# Altium PCB Power Distribution 1A out.PcbDoc
Units mil, origin at the board's own origin, x right, y up, seen from the top; angles counter-clockwise.
Board outline 5000 x 1750 mil, 4 copper layers (L1, L2 (GNDs), L3 (+Vsups), L4), stack 23.712 mil thick; 35 components, 20 nets, 100 pads, 19 vias.
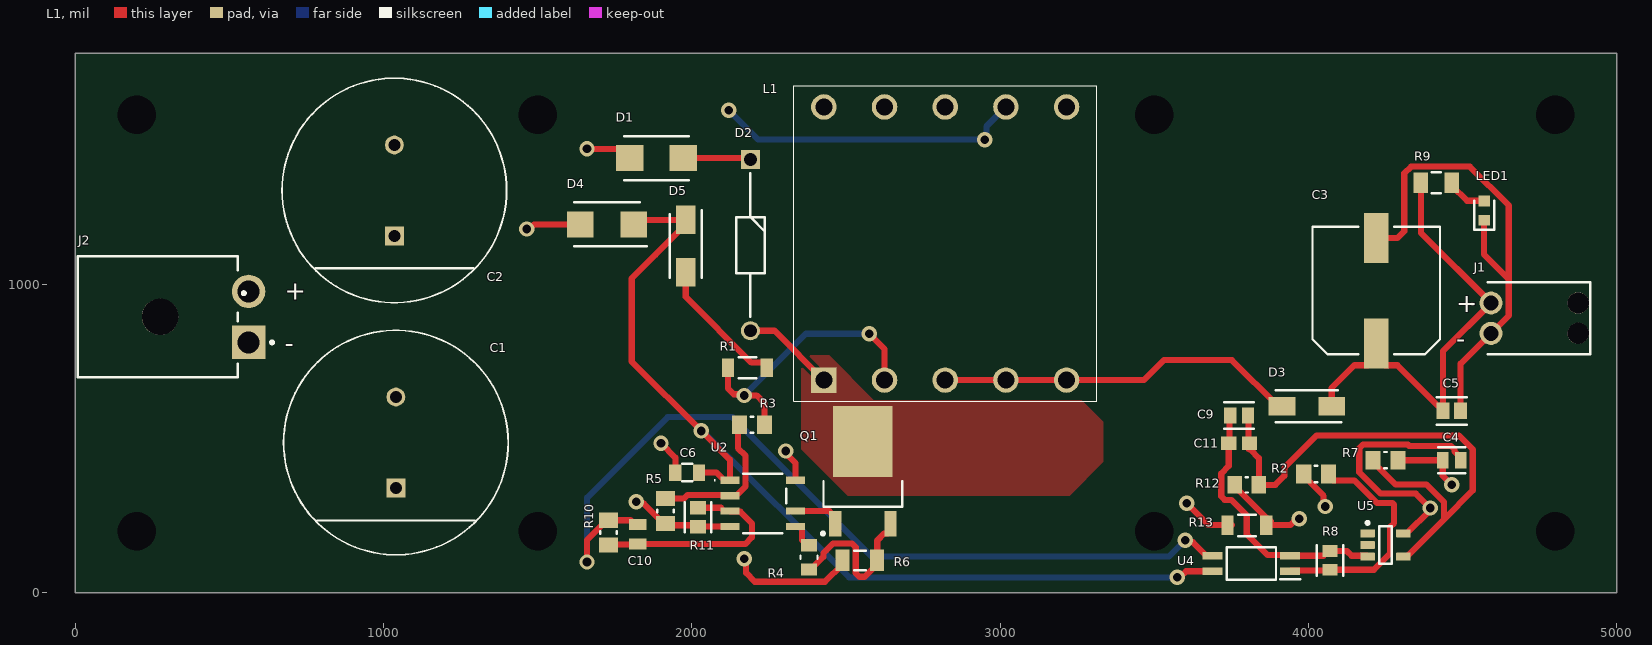
[diagram p0: L1 view]
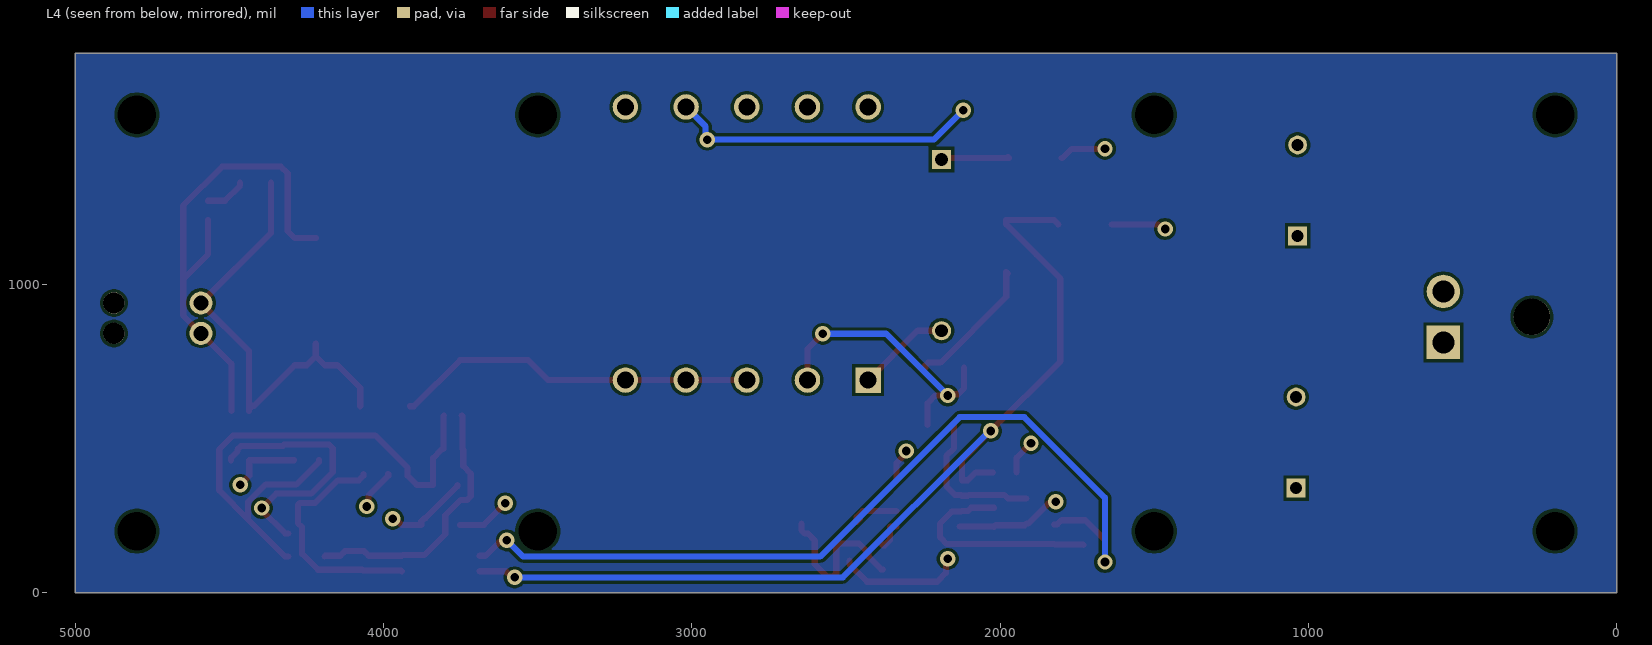
[diagram p1: L4 view, seen from below]
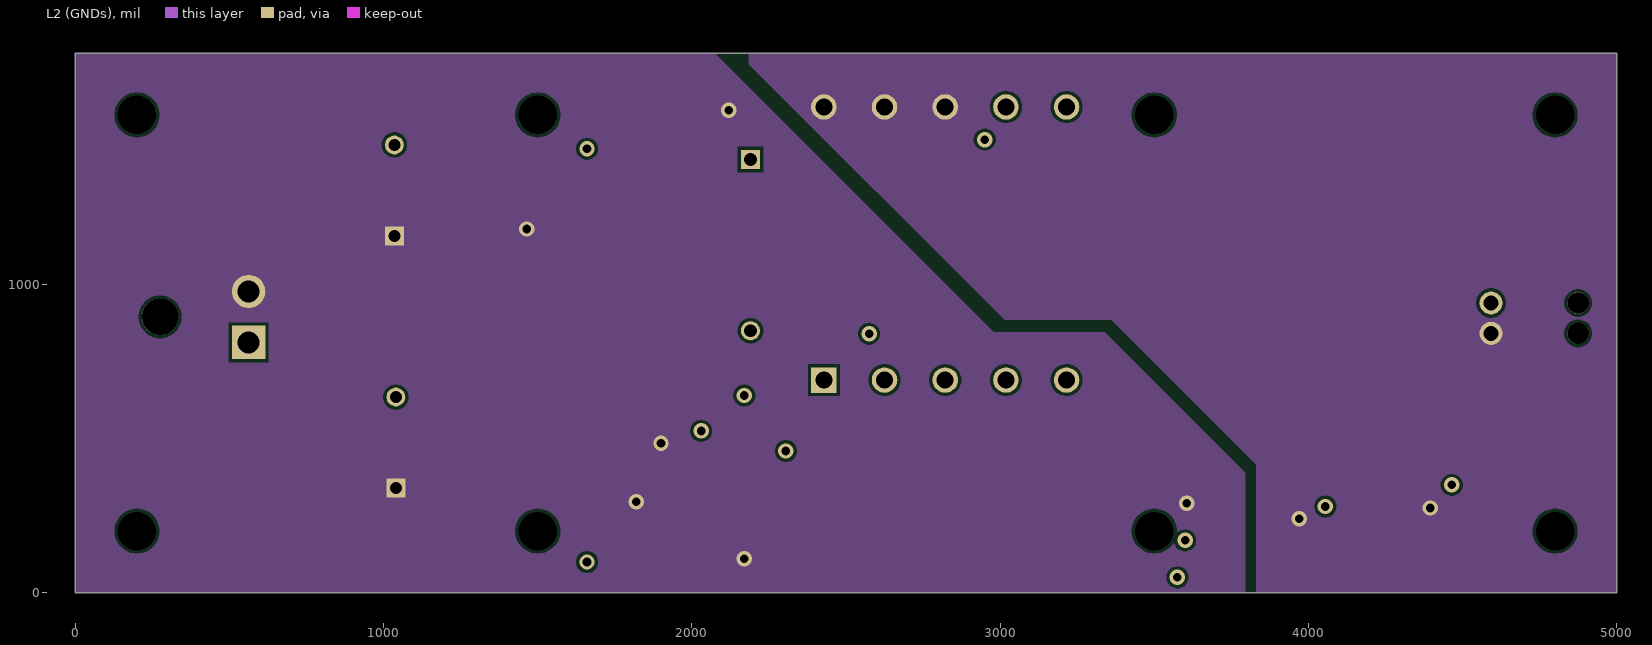
[diagram p2: L2 (GNDs)]
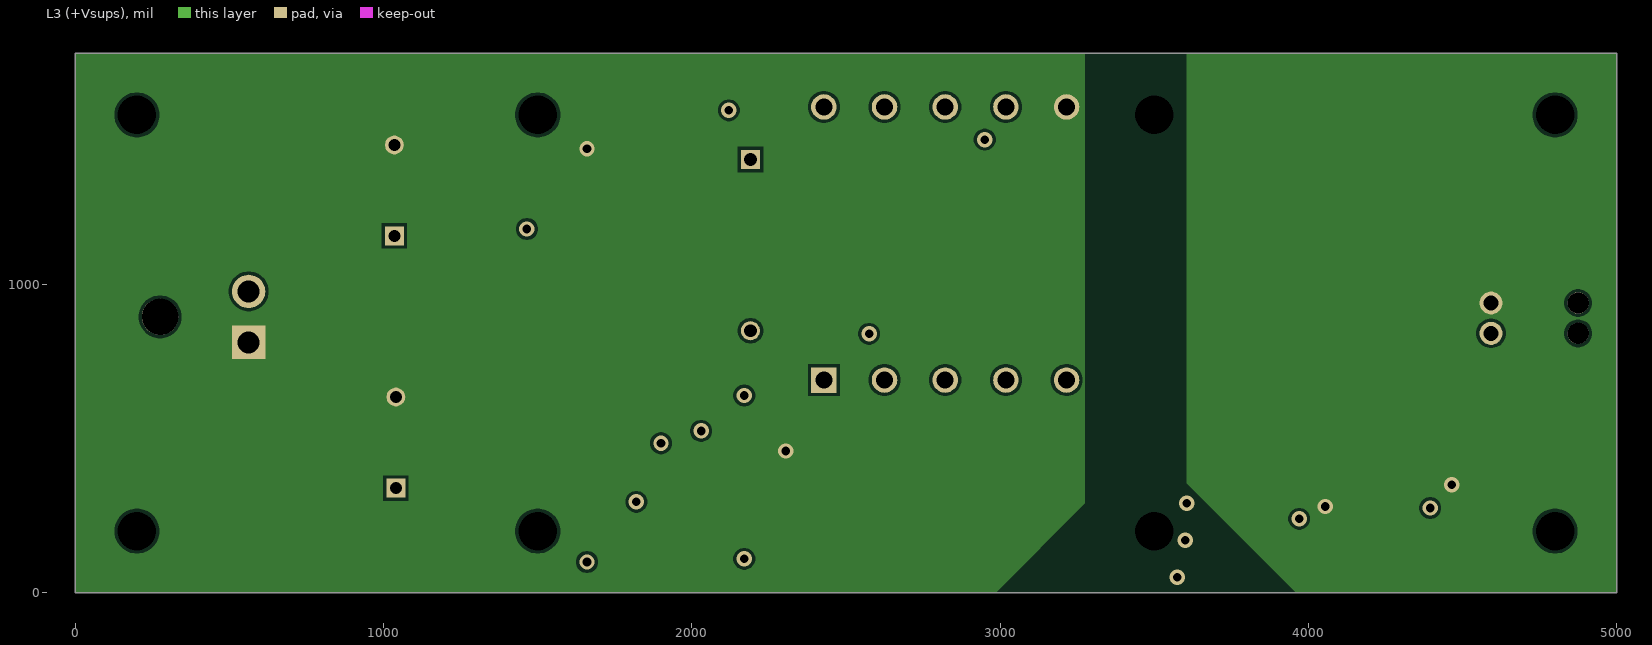
[diagram p3: L3 (+Vsups)]
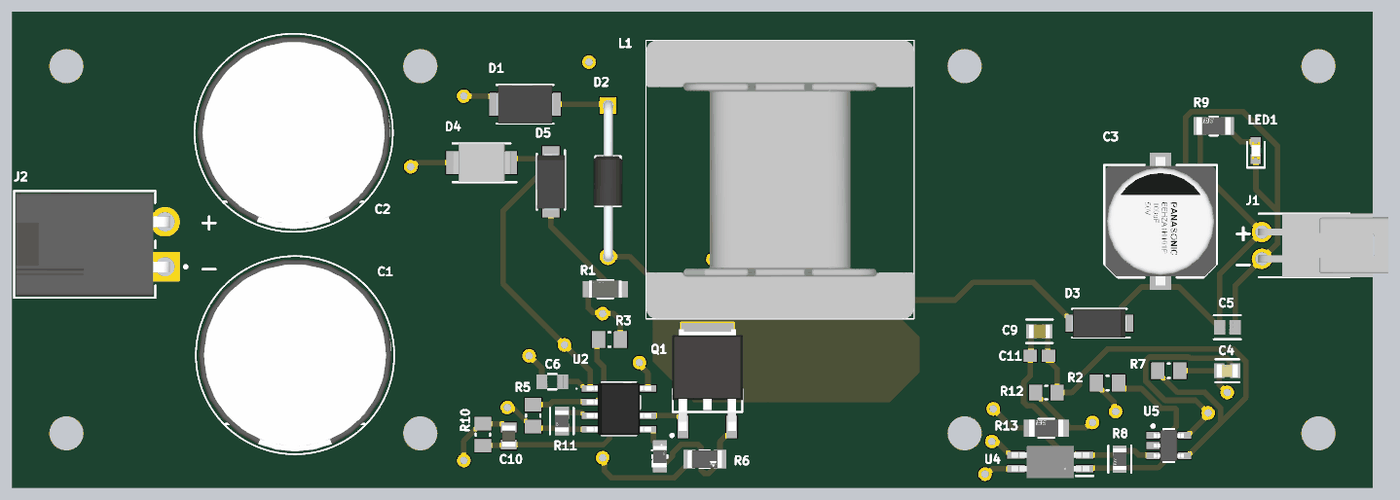
[diagram p4: 3D render of the assembled board from above, using the file's embedded part models]

## Layer stack, top to bottom
Top Solder: solder mask 0.709, Solder Resist, Dk 3.5
L1: signal copper 1.378
Dielectric 2: prepreg 2.8, PP-006, Dk 4.1
L2 (GNDs): signal copper 1.378
Dielectric 1: dielectric 12.6, FR-4, Dk 4.8
L3 (+Vsups): signal copper 1.378
Dielectric 3: prepreg 2.8, PP-006, Dk 4.1
L4: signal copper 1.378
Bottom Solder: solder mask 0.709, Solder Resist, Dk 3.5

## Board outline
0,0 5000,0 5000,1750 0,1750

## Design rules (kind name [scope] priority, off if disabled: settings)
Clearance [All] p1: gap=10 ignorepadtopadclearanceinfootprint=FALSE except(0: Arc-Hole Track-Hole SMDPad-Hole THPad-Hole Via-Hole Fill-Hole Poly-Hole Region-Hole Text-Hole)
PolygonConnect [All] p1: connectstyle=Direct reliefconductorwidth=10 reliefentries=4 polygonreliefangle="90 Angle" airgapwidth=10
RoutingLayers RoutingLayers_2 [All] p1: top layer_v5=TRUE mid layer 1_v5=FALSE mid layer 2_v5=FALSE bottom layer_v5=TRUE
RoutingLayers RoutingLayers_1 [All] p2: top layer_v5=TRUE mid layer 1_v5=TRUE mid layer 2_v5=FALSE bottom layer_v5=FALSE
RoutingLayers [All] p3: top layer_v5=TRUE mid layer 1_v5=FALSE mid layer 2_v5=TRUE bottom layer_v5=FALSE
RoutingVias [All] p1: holewidth=28 width=50 viastyle="Through Hole" minholewidth=28 minwidth=50 maxholewidth=28 maxwidth=50
SolderMaskExpansion [All] p1: expansion=4 istentingtop=FALSE
Width [All] p1: maxlimit=50 minlimit=10 preferedwidth=20 minimp=50.000000 maximp=50.000000 favimp=50.000000
29 further rules are at their usual default settings.

## Components (designator, comment, footprint, x,y, rotation, side; value= is the part's Value field where it differs from the comment)
C1 "47uF" FP-RAD-TH-D_18_0_5-L_20_2-MFG 1040,487.36 r90 top
C2 "47uF" FP-RAD-TH-D_18_0_5-L_20_2-MFG 1035,1305 r90 top
C3 "100uF" FP-ZAG-MFG 4220,980 r270 top
C4 "0.1uF" FP-C0805C-DN-MFG 4465,430 r0 top value="0.10 μF"
C5 "1uF" FP-CL21-IPC_C 4465,590 r0 top
C6 "4.7uF" FP-CGA4J-IPC_C 1985,390 r180 top
C9 "14pF" FP-GQM219-0_15-IPC_C 3775,575 r0 top
C10 "100nF" CAPC2013X94N 1825,190 r90 top
C11 "300pF" CAPC1608X90X35ML15T15 3775,485 r0 top
D1 "SMBJ120A-13-F" DIONM5336X250N 1885,1410 r180 top
D2 "UF4007TA" DIOAD1408W86L464D236 2190,1405.12 r270 top
D3 "BYS10-35-E3_TR" DIOM5127X229N 3995,605 r180 top
D4 "SMBJ22A-Q" DIOM5436X244N 1725,1195 r180 top
D5 "SK220ATR" DIOM5226X295N 1980,1125 r270 top
J1 "105313-1202" 105313-1202 4580.91,890.79 r90 top
J2 "172648-0102" FP-172648-0102-MFG 267.13,895 r270 top
L1 "209:18:12 Custom Flyback Transformer" "49:5 Custom Flyback Transformer-Footprint-1" 2428.15,690 r0 top
LED1 "LTST-C191KGKT" LEDC1608X55N 4570,1240 r90 top
Q1 "STD3NK80ZT4" TO228P972X240-3N 2555,395 r90 top
R1 "22" FP-AC1206-MFG 2180,730 r180 top value=22Ω
R2 "RK73H2ATTD1502F" RESC2013X60X30ML20T20 4025,385 r180 top
R3 "75k" RESC2013X60X30ML20T20 2195,545 r0 top
R4 "1k" FP-RNCP0805-MFG 2380,115 r270 top
R5 "18.2k" RESC2013X60X30ML20T20 1915,265 r90 top
R6 "1.78" FP-CRCW1206-e3-IPC_B 2545,105 r0 top
R7 "442k" RESC2013X60X30ML20T20 4250,430 r0 top
R8 "1k" FP-RMCF0805-IPC_C 4070,105 r270 top
R9 "2k" FP-RMCF1206-IPC_C 4415,1330 r180 top
R10 "210k" RESC2013X50X30ML20T20 1730,195 r90 top
R11 "20k" FP-RNCP0805-IPC_C 2020,245 r90 top
R12 "43.2k" RESC2013X60X35ML10T20 3800,350 r0 top
R13 "0 Ohm Jumper" FP-RMCF1206-MFG 3800.02,218.51 r180 top
U2 "UCC28740QDRQ1" UCC28740QDRQ1 2230,290 r0 top
U4 "PS2811-1-F3-K-A" SOIC127P700X210-4N 3815,95 r180 top
U5 "TL431IDBVR" DBV0005A_M 4250,155 r0 top

## Footprints (in the part's own frame and the unit in brackets; to place one, negate y for a bottom-side part, rotate by r counter-clockwise, add the part's x,y. Pads: shape width x height; smd on the part's side, far side on the other; paste and mask are expansions set on the pad)
"49:5 Custom Flyback Transformer-Footprint-1" [mm]
  rect 2.1x2.1 hole 1.4: 1(0,0)
  round 2.1 hole 1.4: 2(5,0) 3(10,0) 4(15,0) 5(20,0) 6(20,22.5) 7(15,22.5) 8(10,22.5) 9(5,22.5) 10(0,22.5)
  silkscreen extent -2.5,-1.75 22.5,24.25, body extent -2.5,-1.75 22.5,24.25, height 13.04
105313-1202 [mm]
  round 1.9 hole 1.25: 1(1.25,-0.29) 2(-1.25,-0.29)
  round 1.75 hole 1.75 unplated: 3(1.25,-7.47) 4(-1.25,-7.47)
  silkscreen extent -2.97,-8.46 2.97,1.29, body extent -2.97,-12.09 2.97,0.07, height 6.5
CAPC1608X90X35ML15T15 [mm] "Chip Capacitor, 2-Leads, Body 1.60x0.81mm, IPC Low Density"
  rect 1.25x1.1 smd: 1(-0.85,0) 2(0.85,0)
  body extent -0.88,-0.48 0.87,0.48, height 0.9
CAPC2013X94N [mil]
  rect 36x57 smd: 1(-32,0) 2(32,0)
  body extent -40,-25 40,25, height 37
DBV0005A_M [mm] "SOT23, 5-Leads, Body 3.05x1.75mm, Pitch 0.95mm, IPC Low Density"
  rrect15% 1.2x0.65 smd: 1(-1.475,0.95) 2(-1.475,0) 3(-1.475,-0.95) 4(1.475,-0.95) 5(1.475,0.95)
  silkscreen extent -1.6,-1.55 0.5,1.95, body extent -1.42,-1.46 1.42,1.46, height 1.08
DIOAD1408W86L464D236 [mm]
  rect 1.575x1.575 hole 1.05: 1(0,0)
  round 1.575 hole 1.05: 2(14.1,0)
  silkscreen extent 1.14,-1.18 12.96,1.18, body extent -0.43,-1.35 14.51,1.35, height 2.72
DIOM5127X229N [mm]
  rect 2.2x1.55 smd: 1(-2.05,0) 2(2.05,0)
  silkscreen extent -2.83,-1.33 2.55,1.33, body extent -2.55,-1.33 2.55,1.33, height 2.29
DIOM5226X295N [mm]
  rect 2.35x1.6 smd: 1(-2.15,0) 2(2.15,0)
  silkscreen extent -2.95,-1.31 2.62,1.31, body extent -2.62,-1.31 2.62,1.31, height 2.95
DIOM5436X244N [mm]
  rect 2.2x2.15 smd: 1(-2.2,0) 2(2.2,0)
  silkscreen extent -3.27,-1.81 2.7,1.81, body extent -2.7,-1.81 2.7,1.81, height 2.31
DIONM5336X250N [mm]
  rect 2.25x2.15 smd: 1(-2.2,0) 2(2.2,0)
  silkscreen extent -2.65,-1.81 2.65,1.81, body extent -2.65,-1.81 2.65,1.81, height 2.5
FP-172648-0102-MFG [mm]
  rect 2.75x2.75 hole 1.8 paste-1000 mask+0: 1(2.1,7.5)
  round 2.75 hole 1.8 paste-1000 mask+0: 2(-2.1,7.5)
  round 3 hole 3 unplated paste-1000 mask+0: ""(0,0.2)
  silkscreen extent -4.99,-6.59 4.99,9.55, body extent -5.09,-6.69 5.09,8.98, height 0.25
FP-AC1206-MFG [mm]
  rect 1x1.5 smd paste+0 mask+0: 1(-1.6,0) 2(1.6,0)
  silkscreen extent -0.72,-0.85 0.72,0.85, body extent -2.2,-0.95 2.2,0.95, height 0.25
FP-C0805C-DN-MFG [mm]
  rect 0.95x1.35 smd paste+0 mask+0: 1(-0.75,0) 2(0.75,0)
  silkscreen extent -1.1,-1.07 1.1,1.07, body extent -1.4,-0.85 1.4,0.85, height 0.25
FP-CGA4J-IPC_C [mil]
  rect 40x53.39 smd paste+0 mask+0: 1(-38.39,0) 2(38.39,0)
  silkscreen extent -16,-29 16,29, body extent -53,-32 53,32, height 10
FP-CL21-IPC_C [mil]
  rect 41.52x53.39 smd paste+0 mask+0: 1(-28.57,0) 2(28.57,0)
  silkscreen extent -49,-44 49,44, body extent -53,-32 53,32, height 10
FP-CRCW1206-e3-IPC_B [mil]
  rect 45.51x69.22 smd paste+0 mask+0: 1(-56.14,0) 2(56.14,0)
  silkscreen extent -19,-31 19,31, body extent -89,-44 89,44, height 10
FP-GQM219-0_15-IPC_C [mil]
  rect 39.6x51.5 smd paste+0 mask+0: 1(-28.59,0) 2(28.59,0)
  silkscreen extent -48,-43 48,43, body extent -52,-31 52,31, height 10
FP-RAD-TH-D_18_0_5-L_20_2-MFG [mm]
  rect 1.55x1.55 hole 1 paste-1000 mask+0: 1(-3.75,0)
  round 1.55 hole 1 paste-1000 mask+0: 2(3.75,0)
  silkscreen extent -9.25,-9.25 9.25,9.25, body extent -9.35,-9.35 9.35,9.35, height 0.25
FP-RMCF0805-IPC_C [mil]
  rect 37.58x49.69 smd paste+0 mask+0: 1(-30.54,0) 2(30.54,0)
  silkscreen extent -49,-42 49,42, body extent -53,-31 53,31, height 10
FP-RMCF1206-IPC_C [mil]
  rect 47.39x65.28 smd paste+0 mask+0: 1(-50.22,0) 2(50.22,0)
  silkscreen extent -15,-34 15,34, body extent -78,-38 78,38, height 10
FP-RMCF1206-MFG [mm]
  rect 1x1.6 smd paste+0 mask+0: 1(-1.6,0) 2(1.6,0)
  silkscreen extent -0.72,-0.87 0.72,0.87, body extent -2.2,-0.97 2.2,0.97, height 0.25
FP-RNCP0805-IPC_C [mil]
  rect 43.52x51.5 smd paste+0 mask+0: 1(-31,0) 2(30.63,0)
  silkscreen extent -48,-43 48,43, body extent -52,-31 52,31, height 10
FP-RNCP0805-MFG [mm]
  rect 1x1.3 smd paste+0 mask+0: 1(-1,0) 2(1,0)
  silkscreen extent -0.13,-0.7 0.13,0.7, body extent -1.6,-0.8 1.6,0.8, height 0.25
FP-ZAG-MFG [mm]
  rect 4.1x2 smd paste+0 mask+0: 1(-4.35,0) 2(4.35,0)
  silkscreen extent -5.25,-5.25 5.25,5.25, body extent -6.65,-5.5 6.65,5.5, height 0.25
LEDC1608X55N [mm]
  rect 0.9x0.95 smd: 1(-0.8,0) 2(0.8,0)
  silkscreen extent -1.6,-0.82 0.8,0.82, body extent -0.83,-0.4 0.77,0.4, height 0.55
RESC2013X50X30ML20T20 [mm] "Chip Resistor, 2-Leads, Body 2.00x1.25mm, IPC Low Density"
  rect 1.25x1.55 smd: 1(-1.025,0) 2(1.025,0)
  silkscreen extent -0.1,-0.67 0.1,0.67, body extent -1.1,-0.72 1.1,0.72, height 0.5
RESC2013X60X30ML20T20 [mm] "Chip Resistor, 2-Leads, Body 2.00x1.25mm, IPC Low Density"
  rect 1.25x1.55 smd: 1(-1.025,0) 2(1.025,0)
  silkscreen extent -0.1,-0.67 0.1,0.67, body extent -1.1,-0.72 1.1,0.72, height 0.6
RESC2013X60X35ML10T20 [mm] "Chip Resistor, 2-Leads, Body 2.00x1.25mm, IPC Low Density"
  rect 1.2x1.45 smd: 1(-1,0) 2(1,0)
  silkscreen extent -0.1,-0.63 0.1,0.63, body extent -1.05,-0.67 1.05,0.67, height 0.6
SOIC127P700X210-4N [mm]
  rect 1.65x0.65 smd: 1(-3.2,0.635) 2(-3.2,-0.635) 3(3.2,-0.635) 4(3.2,0.635)
  silkscreen extent -4.03,-1.35 2.02,1.35, body extent -3.64,-1.5 3.64,1.5, height 2.11
TO228P972X240-3N [mm]
  rect 2.1x1 smd: 1(-4.35,2.28) 3(-4.35,-2.28)
  rect 5.85x4.9 smd: 4(2.45,0)
  silkscreen extent -5.27,-3.25 -0.85,3.42, body extent -4.78,-3.3 4.75,3.3, height 2.3
UCC28740QDRQ1 [mm]
  rect 1.55x0.6 smd: 1(-2.7,1.905) 2(-2.7,0.635) 3(-2.7,-0.635) 4(-2.7,-1.905) 5(2.7,-1.905) 6(2.7,-0.635) 8(2.7,1.905)
  silkscreen extent -4,-2.45 1.95,2.45, body extent -3.01,-2.45 3.01,2.45, height 1.63

## Part data
C1 C2: library part CMP-05427-000817-1, "Aluminum Electrolytic Capacitors (Radial Lead Type) 47uF ±20% 400V", Case/Package=Radial, Dielectric Material=Aluminium, Max Operating Temperature=105°C, Min Operating Temperature=-25°C, Package Quantity=100, Ripple Current=840mA, Tolerance=20%, Voltage=400V, Capacitance=47uF, Construction=RADIAL, Diameter=18mm, Dissipation Factor=0.24%, Height=20mm, Height - Seated (Max)=0.787inch, Lead Diameter=0.8mm, Lead Free="Lead Free", Lead Pitch=7.5mm, Length=20mm, Life (Hours)=10000Hour, Mount="Through Hole", Number of Pins=2, Packaging=Bulk, Radiation Hardening=No, REACH SVHC="No SVHC", Ripple Current (AC)=840mA, RoHS Compliant=Yes, Series=ED, Termination=Radial, Voltage Rating=400V, Voltage Rating (DC)=400V
C3: library part CMP-2000-06221-2, "CAP ALUM POLY HYB 100UF 50V SMD", Leakage Current=50uA, Manufacturer=Panasonic, Manufacturer Part Number=EEHZA1H101P, Package=ZAG, Ripple Current=2000mA, Temperature="-55°C to +105°C", Temperature Range High=+105°C, Temperature Range Low=-55°C, Tolerance=20%, Voltage=50V, Automotive=Yes, Automotive Grade="Grade 2", Capacitance=100uF, Category=Cap, ComponentLink2Description=Datasheet, ComponentLink2URL=https://industrial.panasonic.com/cdbs/www-data/pdf/RDD0000/ABA0000C1221.pdf, Device Class L1="Passive Components", Device Class L2=Capacitors, Device Class L3="Polymer Capacitors", Digikey Description="CAP ALUM POLY HYB 100UF 50V SMD", Dissipation Factor=10%, Esr=28mΩ, Footprint Url=https://industrial.panasonic.com/cdbs/www-data/pdf/RDD0000/DMD0000COL4.pdf, Height=10.5mm, Lead Free=Yes, Life=10000Hours, Material="Conductive Polymer", Mounting Type="Surface Mount", Mouser Description="Cap Aluminum Polymer Hybrid 100uF 50VDC 20% (10 X 10.2mm) SMD 0.028 Ohm 2000mA 10000h 105C Embossed T/R", Octopart=https://octopart.com/eeh-za1h101p-panasonic-22287466, RoHS=TRUE, Voltage Rating=50V
C4: library part CMP-1036-04423-3, "CAP CER 0.1UF 50V X7R 0805", Capacitance="0.10 μF", Manufacturer=KEMET, Manufacturer Part Number=C0805C104M5RACTU, Package=C0805C-DN, Temperature="-55°C to +125°C", Temperature Characteristic=X7R, Temperature Coefficient=30ppm/°C, Temperature Range High=+125°C, Temperature Range Low=-55°C, Tolerance=0.2, Voltage Rating="50 V", Automotive=No, Category=Cap, ComponentLink2Description=Datasheet, ComponentLink2URL=https://content.kemet.com/datasheets/KEM_C1003_C0G_SMD.pdf, Device Class L1="Passive Components", Device Class L2=Capacitors, Device Class L3="Ceramic Capacitors", Digikey Description="CAP CER 0.1UF 50V X7R 0805", Height=0.88mm, Ipc Land Pattern Name=CAPC200125X78, Lead Free=Yes, Material=Ceramic, Mouser Description="Multilayer Ceramic Capacitors MLCC - SMD/SMT 50volts 0.1uF X7R 20%", Octopart=https://octopart.com/c0805c104m5ractu-kemet-129379, RoHS=TRUE
C5: library part CMP-13271-001433-1, "CL21 Series 0805 1uF 50V ±10% Tolerance X7R Multilayer Ceramic Chip Capacitor", Case Code (Imperial)=0805, Case Code (Metric)=2012, Dielectric=X7R, Max Operating Temperature=125°C, Min Operating Temperature=-55°C, Package Quantity=3000, Tolerance=10%, Voltage=50V, Capacitance=1uF, Case/Package=0805, Contact Plating=Tin, Depth=1.25mm, Length=2mm, Material=Ceramic, Mount="Surface Mount", Packaging="Tape and Reel", Termination=Wraparound, Thickness=0.053inch, Voltage Rating=50V, Width=0.049inch
C6: library part CMP-08246-002380-1, "Cap Ceramic 4.7uF 35V X7R 10% Pad SMD 0805 +125°C Automotive T/R", Case Code (Imperial)=0805, Case Code (Metric)=2012, Dielectric=X7R, Max Operating Temperature=125°C, Min Operating Temperature=-55°C, Package Quantity=2000, Ratings=AEC-Q200, Tolerance=10%, Voltage Rating=35V, Capacitance=4.7uF, Case/Package=0805, Height=1.25mm, Lead Free="Lead Free", Length=0.079inch, Mount="Surface Mount", Packaging="Tape and Reel", Termination=SMD/SMT, Thickness=0.057inch, Voltage Rating (DC)=35V, Weight=0.000194oz, Width=0.049inch
C9: library part CMP-06035-036393-1, "Ceramic Capacitor 14pF ±5% 250VDC C0G 0805 Paper T/R", Dielectric=C0G, Tolerance=5%, Voltage Rating (DC)=250V, Capacitance=14pF, Length=2mm, Thickness=850um, Width=1.25mm
C10: library part 08053C104JAZ2A, "Capacitor", Manufacturer_Name=AVX, Mouser Part Number=581-08053C104JAZ2A, Arrow Part Number=08053C104JAZ2A, Arrow Price/Stock=https://www.arrow.com/en/products/08053c104jaz2a/avx, Manufacturer_Part_Number=08053C104JAZ2A, Mouser Price/Stock=https://www.mouser.co.uk/ProductDetail/AVX/08053C104JAZ2A?qs=YtXa1zY%252Bjw7108MDhSwtdw%3D%3D
C11: library part CMP-2006-04293-1, Manufacturer="AVX Interconnect / Elco", Part Number=06035A301JAT2A
D1: "Diode", Manufacturer_Name="Diodes Inc.", Mouser Part Number=621-SMBJ120A-13-F, Arrow Part Number=SMBJ120A-13-F, Arrow Price/Stock=https://www.arrow.com/en/products/smbj120a-13-f/diodes-incorporated?region=nac, Datasheet Link=https://www.diodes.com/assets/Datasheets/ds19002.pdf, Height=2.5mm, Manufacturer_Part_Number=SMBJ120A-13-F, Mouser Price/Stock=https://www.mouser.co.uk/ProductDetail/Diodes-Incorporated/SMBJ120A-13-F?qs=gaDBXWSqsDBmDdTbpuKy2g%3D%3D
D2: "Diode", Manufacturer_Name="SMC Diode Solutions", Supplier Part Number 1=1655-1692-1-ND, Datasheet Link=http://www.smc-diodes.com/propdf/UF4001%20THRU%20UF4007%20N0115%20REV.C.pdf, Manufacturer_Part_Number=UF4007TA, Supplier 1=Digi-Key
D3: "Schottky Diode", Arrow Part Number=BYS10-35-E3/TR, Manufacturer_Name=Vishay, Mouser Part Number=625-BYS10-35-E3, Arrow Price/Stock=https://www.arrow.com/en/products/bys10-35-e3tr/vishay?region=nac, Datasheet Link=https://www.vishay.com/docs/86013/bys10.pdf, Height=2.29mm, Manufacturer_Part_Number=BYS10-35-E3/TR, Mouser Price/Stock=https://www.mouser.co.uk/ProductDetail/Vishay-General-Semiconductor/BYS10-35-E3-TR?qs=kop3EGWU%252BIt7bsLwSoB09A%3D%3D
D4: "TVS Diode (Uni-directional)", Manufacturer_Name=Bourns, Mouser Part Number=652-SMBJ22A-Q, Datasheet Link=https://www.bourns.com/docs/Product-Datasheets/SMBJ-Q.pdf, Height=2.44mm, Manufacturer_Part_Number=SMBJ22A-Q, Mouser Price/Stock=https://www.mouser.co.uk/ProductDetail/Bourns/SMBJ22A-Q?qs=f9yNj16SXrJgu7KaxxVlxA%3D%3D
D5: "Diode", Manufacturer_Name="SMC Diode Solutions", Datasheet Link=http://www.smc-diodes.com/propdf/SK220A%20N0942%20REV.B.pdf, Height=2.95mm, Manufacturer_Part_Number=SK220ATR
J1: "Connector", Manufacturer_Name=Molex, Mouser Part Number=538-105313-1202, Datasheet Link=http://www.molex.com/pdm_docs/sd/1053131202_sd.pdf, Manufacturer_Part_Number=105313-1202, Mouser Price/Stock=https://www.mouser.co.uk/ProductDetail/Molex/105313-1202?qs=PqFvFmEiOr6Yr1uRJ10a3A%3D%3D
J2: library part CMP-04776-000216-1, "CONN HEADER R/A 2POS 4.2MM"
L1: library part CMP-012-00000-5, "Custom Coupled Inductors with primary, auxillary, and secondary windings", Case/Package=B66422W1010D001, Inductance Factor=133nH, Auxillary AWG=28, Auxillary Insulation Type="Heavy Insulated Magnet Wire", Auxillary Layers=1, Auxillary Strands=3, Auxillary Turns=12, Core PN=B66421G0000X197, Core Size=EFD25/13/9, Lp=5.37mH, Mounting Technology=THT, Pins=10, Primary  Layers=3, Primary AWG=33, Primary Insulation Type="Heavy Insulated Magnet Wire", Primary Strands=1, Primary Turns=201, Secondary AWG=24, Secondary Insulation Type="Triple Insulated", Secondary Layers=1, Secondary Strands=1, Secondary Turns=18, Turns Ratio=209:18:12
LED1: "LED", Manufacturer_Name=Lite-On, Mouser Part Number=859-LTST-C191KGKT, Arrow Part Number=LTST-C191KGKT, Arrow Price/Stock=https://www.arrow.com/en/products/ltst-c191kgkt/lite-on-technology?region=nac, Datasheet Link=http://www.mouser.com/ds/2/239/S_110_LTST-C191KGKT-369560.pdf, Height=0.55mm, Manufacturer_Part_Number=LTST-C191KGKT, Mouser Price/Stock=https://www.mouser.co.uk/ProductDetail/Lite-On/LTST-C191KGKT?qs=xSPZu9B1aMCRQ5ACasEYAg%3D%3D
Q1: "Integrated Circuit", Manufacturer_Name=STMicroelectronics, Mouser Part Number=511-STD3NK80Z, Arrow Part Number=STD3NK80ZT4, Arrow Price/Stock=https://www.arrow.com/en/products/std3nk80zt4/stmicroelectronics?region=nac, Datasheet Link=http://www.st.com/web/en/resource/technical/document/datasheet/CD00003377.pdf, Height=2.4mm, Manufacturer_Part_Number=STD3NK80ZT4, Mouser Price/Stock=https://www.mouser.co.uk/ProductDetail/STMicroelectronics/STD3NK80ZT4?qs=fk02mZV2aoKqM6vxV%2FnY%2Fw%3D%3D
R1: library part CMP-03412-015944-1, "RES SMD 22 OHM 1% 1/4W 1206", Manufacturer=Yageo, Manufacturer Part Number=AC1206FR-0722RL, Package=AC1206, Power Rating=0.25W, Resistance=22Ω, Temperature="-55°C to +155°C", Temperature Range High=+155°C, Temperature Range Low=-55°C, Tolerance=0.01, Voltage Rating=200V, Automotive=Yes, Automotive Grade="Grade 0", Category=Res, ComponentLink2Description=Datasheet, ComponentLink2URL=http://www.yageo.com/NewPortal/yageodocoutput?fileName=/pdf/R-Chip/PYu-AC_51_RoHS_L_6.pdf, Composition="Thick Film", Device Class L1="Passive Components", Device Class L2=Resistors, Device Class L3="Chip SMD Resistors", Digikey Description="RES SMD 22 OHM 1% 1/4W 1206", Footprint Url=http://www.yageo.com/exep/pages/download/literatures/PYu-R_Mount_10.pdf, Height=0.65mm, Ipc Land Pattern Name=RESC310160X55, Lead Free=Yes, Mouser Description="Thick Film Resistors - SMD 1/4W 22ohm 1% AEC-Q200", Octopart=https://octopart.com/ac1206fr-0722rl-yageo-24787283, RoHS=TRUE, Series=AC
R2: library part CMP-009-00193-1, "Res Thick Film 0805 15K Ohm 1% 0.25W(1/4W) ±100ppm/C Pad SMD Automotive T/R"
R3: library part CMP-009-00188-1, "Res Thick Film 0805 75K Ohm 1% 0.25W(1/4W) ±100ppm/C Pad SMD Automotive T/R"
R4: library part CMP-26527-001902-1, "1kΩ ±1% 0.25W 0805 High Power Anti-Sulfur Thin Film Chip Resistor", Case Code (Imperial)=0805, Case Code (Metric)=2012, Max Operating Temperature=155°C, Max Power Dissipation=250mW, Min Operating Temperature=-55°C, Resistance=1kR, Resistor Type="Thin Film", Temperature Coefficient=100ppm/°C, Tolerance=1%, Case/Package=0805, Features="Moisture Resistant", Height=0.024inch, Lead Free="Lead Free", Length=0.079inch, Mount="Surface Mount", Number of Terminations=2, Packaging="Tape and Reel", Power Rating=250mW, RoHS Compliant=Yes, Series=RNCP, Size Code=0805, Width=0.049inch
R5: library part CMP-009-00186-1, "Res Thick Film 0805 18.2K Ohm 1% 0.25W(1/4W) ±100ppm/C Pad SMD Automotive T/R"
R6: library part CMP-02407-005156-1, "RES Thick Film, 1.78Ω, 1%, 0.25W, 100ppm/°C, 1206", Case Code (Imperial)=1206, Case Code (Metric)=3216, Max Operating Temperature=155°C, Max Power Dissipation=250mW, Min Operating Temperature=-55°C, Package Quantity=10, Resistance=1.78R, Temperature Coefficient=100ppm/°C, Tolerance=1%, Voltage Rating=200V, Case/Package=1206, Composition="Thick Film", Contact Plating=Tin, Features="Automotive AEC-Q200", Height=0.024inch, Lead Free="Lead Free", Length=0.126inch, Number of Terminations=2, Packaging="Tape and Reel", Power Rating=250mW, Radiation Hardening=No, Termination=SMD/SMT, Voltage Rating (DC)=200V, Weight=0.000353oz, Width=1.6mm
R7: library part CMP-009-00192-1, "Res Thick Film 0805 442K Ohm 1% 0.25W(1/4W) ±100ppm/C Pad SMD Automotive T/R"
R8: library part CMP-26527-002331-1, "1kΩ ±1% 0.125W 0805 Thick Film Chip Resistor AEC-Q200 compliant", Case Code (Imperial)=0805, Case Code (Metric)=2012, Max Operating Temperature=155°C, Max Power Dissipation=125mW, Min Operating Temperature=-55°C, Resistance=1kR, Resistor Type="Thick Film", Temperature Coefficient=100ppm/°C, Tolerance=1%, Case/Package=0805, Construction=Rectangular, Contact Plating=Tin, Depth=1.25mm, Features="Automotive AEC-Q200", Height=0.026inch, Lead Free="Lead Free", Length=2mm, Military Standard=Not, Mount="Surface Mount", Number of Terminations=2, Packaging="Tape and Reel", Power Rating=125mW, Radiation Hardening=No, RoHS Compliant=Yes, Series=RMCF, Size Code=0805, Width=0.049inch
R9: library part CMP-26527-002801-1, "2kΩ ±1% 0.25W 1206 Thick Film Chip Resistor AEC-Q200 compliant", Case Code (Imperial)=1206, Case Code (Metric)=3216, Max Operating Temperature=155°C, Max Power Dissipation=250mW, Min Operating Temperature=-55°C, Package Quantity=10000, Resistance=2kR, Resistor Type="Thick Film", Temperature Coefficient=100ppm/°C, Tolerance=1%, Case/Package=1206, Features="Automotive AEC-Q200", Height=0.028inch, Length=0.126inch, Mount="Surface Mount", Number of Terminations=2, Packaging="Tape and Reel", RoHS Compliant=Yes, Series=RMCF, Width=0.063inch
R10: library part CMP-009-00189-1, "Res Thick Film 0805 210K Ohm 1% 1/8W ±100ppm/°C Molded SMD SMD Paper T/R"
R11: library part CMP-26527-000156-1, "20kΩ ±1% 0.25W 0805 High Power Anti-Sulfur Thin Film Chip Resistor", Case Code (Imperial)=0805, Case Code (Metric)=2012, Max Operating Temperature=155°C, Max Power Dissipation=250mW, Min Operating Temperature=-55°C, Resistance=20kR, Resistor Type="Thin Film", Temperature Coefficient=100ppm/°C, Tolerance=1%, Case/Package=0805, Features="Moisture Resistant", Height=0.024inch, Lead Free="Lead Free", Length=0.079inch, Mount="Surface Mount", Number of Terminations=2, Packaging="Tape and Reel", RoHS Compliant=Yes, Series=RNCP, Width=0.049inch
R12: library part CMP-009-00190-1, "SMD Chip Resistor, 43.2 kOhm, ± 1%, 125 mW, 0805 [2012 Metric], Thick Film, General Purpose"
R13: library part CMP-26527-005649-1, "0Ω ±0 0.25W 1206 Thick Film Chip Resistor AEC-Q200 compliant", Case Code (Imperial)=1206, Case Code (Metric)=3216, Current Rating=2A, Max Operating Temperature=155°C, Max Power Dissipation=250mW, Min Operating Temperature=-55°C, Resistance=0R, Resistor Type="Thick Film", Working Voltage=200V, Case/Package=1206, Construction=Rectangular, Contact Plating=Tin, Depth=1.6mm, Features="Automotive AEC-Q200", Height=0.028inch, Lead Free="Lead Free", Length=0.126inch, Military Standard=Not, Mount="Surface Mount", Number of Terminations=2, Packaging="Tape and Reel", Power Rating=250mW, Radiation Hardening=No, RoHS Compliant=Yes, Series=RMCF, Technology="THICK FILM", Width=0.063inch
U2: "Integrated Circuit", Manufacturer_Name="Texas Instruments", Mouser Part Number=595-UCC28740QDRQ1, Arrow Part Number=UCC28740QDRQ1, Arrow Price/Stock=https://www.arrow.com/en/products/ucc28740qdrq1/texas-instruments?region=nac, Datasheet Link=https://www.ti.com/lit/ds/symlink/ucc28740-q1.pdf?ts=1661309279579&ref_url=https%253A%252F%252Fwww.ti.com%252Fproduct%252FUCC28740-Q1%252Fpart-details%252FUCC28740QDRQ1, Height=1.75mm, Manufacturer_Part_Number=UCC28740QDRQ1, Mouser Price/Stock=https://www.mouser.co.uk/ProductDetail/Texas-Instruments/UCC28740QDRQ1?qs=rkhjVJ6%2F3EIatSKVU4cAvA%3D%3D
U4: "Phototransistor", Manufacturer_Name="Renesas Electronics", Mouser Part Number=551-PS2811-1-F3-K-A, Arrow Part Number=PS2811-1-F3-K-A, Arrow Price/Stock=https://www.arrow.com/en/products/ps2811-1-f3-k-a/renesas-electronics, Datasheet Link=https://datasheet.datasheetarchive.com/originals/distributors/Datasheets-DGA15/788941.pdf, Height=2.1mm, Manufacturer_Part_Number=PS2811-1-F3-K-A, Mouser Price/Stock=https://www.mouser.co.uk/ProductDetail/Renesas-Electronics/PS2811-1-F3-K-A?qs=mW%252Bk1KeWavsVFmgLBa6Jcw%3D%3D
U5: library part CMP-0366-00644-2, "Adjustable Precision Shunt Regulator, 34 ppm / degC, 100 mA, -40 to 85 degC, 5-pin SOT-23 (DBV), Green (RoHS & no Sb/Br)", Manufacturer="Texas Instruments", Rating=Military, Temp Coeff(Max)(ppm/ degree C)=92, Temp Coeff(Typ)(ppm/ degree C)=34, Code_JEDEC=MO-178, ComponentLink1Description="Manufacturer URL", ComponentLink1URL=http://www.ti.com/, ComponentLink2Description=Datasheet, ComponentLink2URL=http://www.ti.com/general/docs/lit/getliterature.tsp?genericPartNumber=TL431&fileType=pdf, ComponentLink3Description="Package Specification", ComponentLink3URL=http://www.ti.com/litv/pdf/mpds018i, DatasheetVersion=SLVS543M, Eco-Plan="Green (RoHS & no Sb/Br)", Initial Accuracy @ 25/deg C(%)=2, Iout/Iz(Max)(mA)=100, Min Iz for Regulation(uA)=600, Mounting Technology="Surface Mount", PackageDescription="5-Pin Plastic Small Outline, Body 1.60 Ã— 2.90 mm, Pitch 0.95 mm", PackageReference=DBV0005A, PackageVersion=4073253-4/K, PartNumber=TL431IDBVR, SubFamily="Shunt Voltage Reference", VO Adj(Max)(V)=36, VO Adj(Min)(V)=2.495

## Free pads (board coordinates)
  round 60 hole 125: 7(200,1550) 8(1500,200) 9(3500,200) 10(200,200) 11(1500,1550) 12(3500,1550) 13(4800,1550) 14(4800,200)

## Via types
v1: diameter 50, hole 28, L1 to L4, 19 vias

## Nets (pads, with @x,y where several pads share a name; then routed paths per layer and width w, separated by ;. In a path a pad name is that pad's centre, name@x,y a point inside that pad or via, vN(x,y) a via of type N, cw(c..) or ccw(c..) an arc to the next point about the centre after c; other vN are vias at no path point)
28VDC: C3.2 C4.1 C5.1 D3.1 J1.1 R2.2 R7.2 R9.2 | length 1845.5
  L1 w20: R2.2 3984.65,379.09 4049.26,314.48 4049.26,285.74 v1(4055,280) ; D3.1 4075.71,664.45 4149.29,738.03 4190.63,738.03 C3.2@4220,767.4 ; C3.2 C3.2@4220,767.4 ; R7.2 C4.1 4435.47,379.53 v1(4465,350) ; R9.2 4364.78,1167.54 J1.1 4436.43,784.1 C5.1@4436.43,595.94 ; C5.1 C5.1@4436.43,595.94 ; C3.2@4220,767.4 4249.37,738.03 4288.39,738.03 4419.73,606.7 4425.67,606.7 C5.1@4436.43,595.94
270VDC: C1.2 C2.2 D1.2 J2.1 L1.6 U2.8 | length 300.5
  L1 w20: J2.1 J2.1@575.08,825 ; v1(1660,1440) 1768.39,1440 D1.2 D1.2@1800.35,1410 ; v1(2305,460) 2305,451.88 2336.3,420.58 U2.8
  L1 w50: J2.1@559.66,809.58 J2.1@575.08,825
EGND: C1.1 C2.1 C6.2 D4.2 J2.2 L1.7 R5.1 R6.1 R11.1 R13.2 U2.4 | length 2227.1
  L1 w20: v1(1465,1180) 1473.12,1180 1488.12,1195 D4.2 ; v1(1820,295) 1825.74,289.26 1844.48,289.26 1909.09,224.65 R5.1 1920.32,219.32 2014.68,219.32 R11.1 ; v1(1900,485) 1946.61,438.39 C6.2 ; R11.1@2020.5,214.5 2123.2,214.5 U2.4 U2.4@2131.8,215 ; v1(2170,110) 2175.74,104.26 2175.74,64.26 2204.06,35.94 2431.65,35.94 2488.86,93.15 R6.1 ; v1(3605,290) 3675,220 R13.2@3752.01,220
  L4 w20: v1(2120,1565) 2215,1470 v1(2950,1470) 2955.74,1475.74 2955.74,1512.87 L1.7
GND: C3.1 C4.2 C5.2 J1.2 L1.8 L1.9 L1.10 LED1.1 R12.1 R13.1 U5.5 | length 2768.9
  L1 w20: R12.1 3760.63,345.08 3864.21,241.5 3868.31,241.5 3877.99,231.81 3877.99,220 3941.88,220 3961.88,240 v1(3970,240) ; C3.1 4289.37,1151.26 4311.08,1172.97 4311.08,1360.93 4332.8,1382.64 4523.56,1382.64 4649.72,1256.47 4649.72,1017.43 ; U5.5 4318.9,192.4 4395,268.5 v1(4395,275) 4348.44,321.56 4234.68,321.56 4165.04,391.2 4165.04,468.8 4176.76,480.51 4323.24,480.51 4327.18,476.57 4462.46,476.57 4474.17,464.86 4474.17,458.23 4494.53,437.87 C4.2 ; C5.2 4493.57,742.83 J1.2 4649.72,898.98 4649.72,1017.43 ; LED1.1 4570,1097.16 4649.72,1017.43
NetC6_1: C6.1 D4.1 D5.1 U2.1 U4.4 | length 3179.2
  L1 w20: D4.1 1826.26,1209.65 D5.1 1980,1194.88 1881.81,1096.69 1881.69,1096.69 1805,1020 1805,750 v1(2030,525) 2123.7,431.3 U2.1 2105,365 2080,390 C6.1 ; v1(3575,50) 3583.12,50 3603.12,70 U4.4
  L4 w20: v1@2045,515 2510,50 v1(3575,50)
NetC9_1: C9.1 C11.1 R8.1 U4.2 U5.3 | length 878.8
  L1 w20: C9.1 3743.97,572.56 3743.97,467.44 3741.54,465 3741.54,411.36 3717.01,386.83 3717.01,313.17 3728.72,301.46 3750.02,301.46 3800.02,251.45 3800.02,189.98 3867.2,122.8 3938.19,122.8 U4.2 4048.4,120 4063.95,135.54 R8.1 4124.85,135.54 4139.99,120.39 4189.13,120.39 U5.3
NetC9_2: C9.2 C11.2 R7.1 R12.2 U5.4 | length 1828.6
  L1 w20: C9.2 3806.03,572.56 3806.03,467.44 3808.46,465 3811.42,465 3839.37,437.05 R12.2 3892.99,350 3922.37,379.38 3922.37,406.13 4026.76,510.51 4487.58,510.51 4533.23,464.86 4533.23,331.93 4440,238.7 ; R7.1 4209.65,424.09 4282.18,351.56 4382.08,351.56 4440,293.64 4440,238.7 ; U5.4 4318.9,117.6 4440,238.7
NetC10_1: C10.1 R10.1 R11.2 U2.3 | length 716.5
  L1 w20: R10.1 1731.68,156.32 1823.32,156.32 C10.1 2173,158 2195,180 2195,225 2156.81,263.19 2125.51,263.19 U2.3 2105,265 2094.37,275.63 R11.2
NetC10_2: C10.2 R10.2 U4.3 | length 2844.1
  L1 w20: v1(1660,100) 1660,171.26 1724.09,235.35 R10.2 1801.15,235.35 1814.5,222 C10.2 ; v1(3600,170) 3605.74,164.26 3625.07,164.26 3669.33,120 U4.3
  L4 w20: v1(1660,100) 1660,308.64 1921.36,570 2131.36,570 2583.86,117.5 3547.5,117.5 v1(3600,170)
NetD1_1: D1.1 D2.1 | length 225.2
  L1 w20: D1.1@1975,1413.39 D1.1 2185.12,1410 D2.1
NetD2_2: D2.2 L1.1 Q1.4 | length 304.4
  L1 w20: D2.2 2268.15,850 L1.1
NetD3_2: D3.2 L1.3 L1.4 L1.5 | length 1181.5
  L1 w20: L1.3 L1.4 L1.5 3466.5,690 3531.5,755 3751.5,755 3901.5,605 D3.2
NetD5_2: D5.2 R1.1 | length 449.8
  L1 w20: D5.2@1975,1035.35 D5.2 1980,960 2193.31,746.69 2233.31,746.69 2242.99,737.01 R1.1
NetL1_2: L1.2 R1.2 R3.2 | length 928.1
  L1 w20: R1.2 2117.01,662.99 2136.11,643.89 v1@2166.11,643.89 ; v1(2170,640) 2210,640 2235.35,614.65 R3.2 ; v1(2575,840) 2625,790 L1.2
  L4 w20: v1(2170,640) 2370,840 v1(2575,840)
NetLED1_2: LED1.2 R9.1 | length 134.3
  L1 w20: R9.1 4465.22,1321.05 4514.78,1271.5 LED1.2
NetQ1_1: Q1.1 U2.6 | length 165.8
  L1 w20: U2.6 2445.63,265 2465.24,245.39 2465.24,230.31 Q1.1@2455.55,240
NetQ1_3: Q1.3 R4.2 R6.2 | length 528.8
  L1 w20: R4.2 2385.91,75.63 2426.7,116.43 2426.7,128.5 2457.81,159.61 2519.9,159.61 2531.72,147.79 2531.72,63.92 2543.54,52.11 2560.1,52.11 2601.14,93.15 2601.14,169.61 2623.94,192.4 2635.08,192.4 2644.76,202.09 Q1.3
NetR2_1: R2.1 R8.2 U4.1 | length 769.2
  L1 w20: U4.1 3943.21,72.23 4067.77,72.23 R8.2 4212.37,74.46 4264.45,126.54 4264.45,212.36 4278.07,225.98 4278.07,285.98 4272.49,291.56 4222.25,291.56 4149.33,364.49 4079.96,364.49 4065.35,379.09 R2.1
NetR3_1: R3.1 R5.2 U2.2 | length 489.9
  L1 w20: R5.2 1973.93,305.35 1985.96,317.39 2102.61,317.39 2105,315 U2.2 2125.51,316.81 2146.12,316.81 2174.21,344.9 2174.21,444.91 2149.65,469.48 2149.65,540 R3.1
NetR4_1: R4.1 U2.5 | length 106.8
  L1 w20: U2.5 2355,215 2356.81,213.19 2356.81,171.65 2374.09,154.37 R4.1 R4.1@2389.69,164.06
pads on no net: J1.3 J1.4 J2. U5.1 U5.2

## Polygon pours and split planes (outlines as drawn)
EGND on L2 (GNDs) "EGND_L02_P022" (solid, pour order 22): 0,0 0,1750 2075,1750 2980,845 3340,845 3795,390 3795,0
GND on L2 (GNDs) "GND_L02_P006" (solid, pour order 6): 5000,0 5000,1750 2185,1750 2185,1715 3015,885 3360,885 3830,415 3830,0
NetD2_2 on L1 "NETD2_2_L01_P020" (solid, pour order 20): 2355,770 2355,465 2505,315 3225,315 3335,425 3335,555 3265,625 2590,625 2445,770
270VDC on L3 (+Vsups) "270VDC_L03_P024" (solid, pour order 24): 0,0 0,1750 3275,1750 3275,290 2985,0
28VDC on L3 (+Vsups) "28VDC_L03_P023" (solid, pour order 23): 5000,1750 5000,0 3960,0 3605,355 3605,1750
no net on L4 "NONET_L04_P025" (solid, pour order 25): 0,0 0,1750 5000,1750 5000,0

## Silkscreen, mask and mechanical layers (free items; w line width, h text height)
Top Overlay:
  text "+" at 680,950 h60
  text "+" at 4480,910 h60
  text "-" at 4480,795.01 h60
  text "-" at 680,780.01 h60